# Altium PCB all.PcbDoc
Units mil, origin at the board's own origin, x right, y up, seen from the top; angles counter-clockwise.
Board outline 6000 x 4000 mil, 2 copper layers (Top Layer, Bottom Layer); 40 components, 30 nets, 132 pads, 0 vias.
Unrouted connection lines stored in the file: 78.
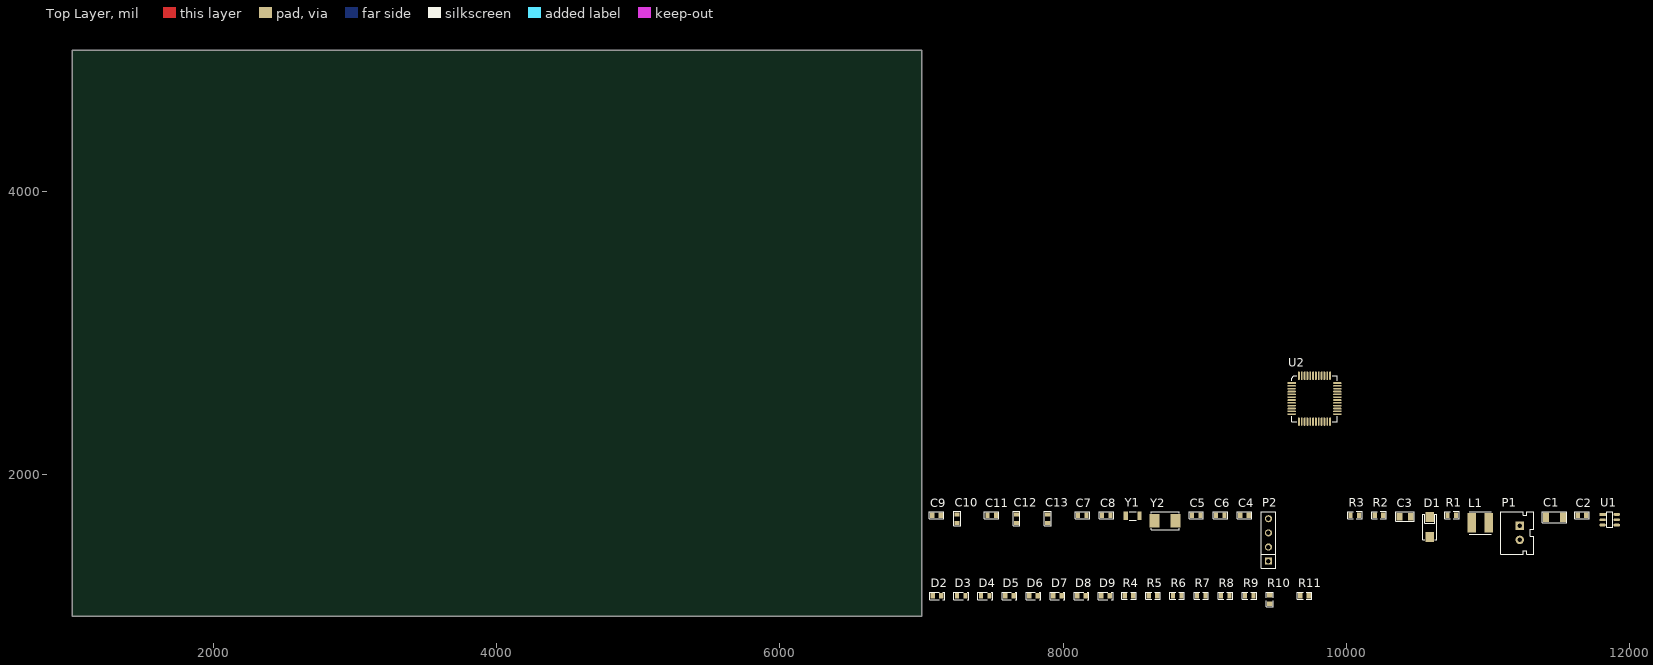
[diagram p0: Top Layer view]
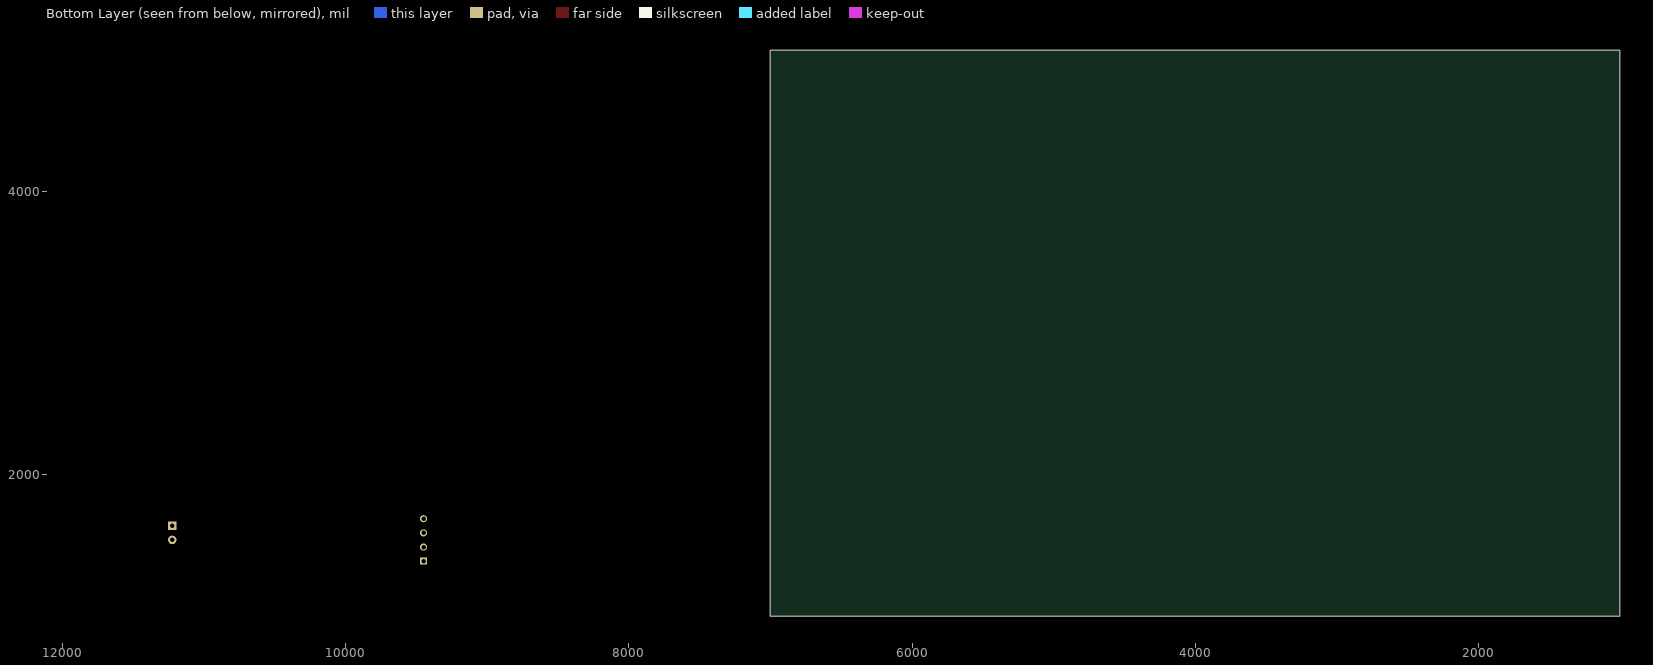
[diagram p1: Bottom Layer view, seen from below]

## Layer stack, top to bottom
Top Solder: solder mask 0.4, Solder Resist, Dk 3.5
Top Layer: signal copper 1.4
Dielectric 1: dielectric 12.6, FR-4, Dk 4.8
Bottom Layer: signal copper 1.4
Bottom Solder: solder mask 0.4, Solder Resist, Dk 3.5

## Board outline
1000,1000 7000,1000 7000,5000 1000,5000

## Design rules (kind name [scope] priority, off if disabled: settings)
Clearance [All] p1: gap=8 ignorepadtopadclearanceinfootprint=FALSE
PolygonConnect [All] p1: connectstyle=Relief reliefconductorwidth=10 reliefentries=4 polygonreliefangle="90 Angle" airgapwidth=10
RoutingVias [All] p1: holewidth=28 width=50 viastyle="Through Hole" minholewidth=28 minwidth=50 maxholewidth=28 maxwidth=50
SolderMaskExpansion [All] p1: expansion=4 istentingtop=FALSE
Width [All] p1: maxlimit=10 minlimit=10 preferedwidth=10
30 further rules are at their usual default settings.

## Components (designator, comment, footprint, x,y, rotation, side; value= is the part's Value field where it differs from the comment)
C1 "475" C1206 11410,1700 r0 top
C2 "103" C0603 11635,1715 r0 top
C3 "226" C0805 10375,1705 r0 top
C4 "104" C0603 9250,1715 r0 top
C5 "15p" C0603 8910,1715 r0 top
C6 "15p" C0603 9080,1715 r0 top
C7 "15p" C0603 8105,1715 r0 top
C8 "15p" C0603 8275,1715 r0 top
C9 "104" C0603 7075,1715 r0 top
C10 "104" C0603 7250,1660 r90 top
C11 "104" C0603 7465,1715 r0 top
C12 "104" C0603 7670,1660 r90 top
C13 "104" C0603 7890,1660 r90 top
D1 "B230A" SMA 10590,1560 r90 top
D2 "RED" LED0603-RED 7080,1145 r0 top
D3 "RED" LED0603-RED 7250,1145 r0 top
D4 "RED" LED0603-RED 7420,1145 r0 top
D5 "RED" LED0603-RED 7590,1145 r0 top
D6 "RED" LED0603-RED 7760,1145 r0 top
D7 "RED" LED0603-RED 7930,1145 r0 top
D8 "RED" LED0603-RED 8100,1145 r0 top
D9 "RED" LED0603-RED 8270,1145 r0 top
L1 "" L4X4 10885,1660 r0 top value=4μ7H
P1 "Header 2" XH2P54P2 11225,1640 r0 top
P2 "Header 4" SIP4 9450,1390 r90 top
R1 "" R0603 10715,1715 r0 top value=100K
R2 "" R0603 10200,1715 r0 top value=49K9
R3 "" R0603 10030,1715 r0 top value=16K2
R4 "" R0603 8435,1145 r0 top value=360R
R5 "" R0603 8605,1145 r0 top value=360R
R6 "" R0603 8775,1145 r0 top value=360R
R7 "" R0603 8945,1145 r0 top value=360R
R8 "" R0603 9115,1145 r0 top value=360R
R9 "" R0603 9285,1145 r0 top value=360R
R10 "" R0603 9460,1090 r90 top value=360R
R11 "" R0603 9675,1145 r0 top value=360R
U1 "MP2359" SOT23-6 11810,1720 r0 top
U2 "STM32F103C8Tx" PQFP48 9613.17,2647.8 r0 top
Y1 "32768" FC-135 8490,1710 r0 top
Y2 "8M" CY5032 8645,1675 r0 top

## Footprints (in the part's own frame and the unit in brackets; to place one, negate y for a bottom-side part, rotate by r counter-clockwise, add the part's x,y. Pads: shape width x height; smd on the part's side, far side on the other; paste and mask are expansions set on the pad)
C0603 [mil]
  rect 30x38 smd: 1(0,0) 2(60,0)
  silkscreen extent -21,-25 81,24, body extent -3,-18 63,18, height 35
C0805 [mil]
  rect 40x54 smd: 1(0,0) 2(80,0)
  silkscreen extent -26,-32 106,33, body extent -3,-29 83,29, height 53
C1206 [mil]
  rect 40x66 smd: 1(0,0) 2(120,0)
  silkscreen extent -27,-40 147,40, body extent -7,-35 127,35, height 39
CY5032 [mm]
  rect 1.8x2.4 smd: 1(0,0) 2(3.8,0)
  silkscreen extent -0.6,-1.6 4.4,1.6, body extent -0.59,-1.6 4.41,1.6, height 1.23
FC-135 [mm]
  rect 0.75x1.5 smd: 1(-1.225,0) 2(1.225,0)
  silkscreen extent -0.64,-0.75 0.64,0.75, body extent -1.6,-0.75 1.6,0.75
L4X4 [mm]
  rect 1.5x3.5 smd: 1(0,0) 2(3.048,0)
  silkscreen extent -0.48,-2 3.52,2, body extent -0.48,-2 3.52,2, height 1.02
LED0603-RED [mil]
  rect 31x38 smd: 1(0,0) 2(60,0)
  silkscreen extent -22,-26 82,26, body extent -1,-16 61,16, height 24
PQFP48 [mil]
  rect 60x12 smd: 1(-0.17,0.2)
  oval 60x12 smd: 2(-0.17,-19.8) 3(-0.17,-39.8) 4(-0.17,-59.8) 5(-0.17,-79.8) 6(-0.17,-99.8) 7(-0.17,-119.8) 8(-0.17,-139.8) 9(-0.17,-159.8) 10(-0.17,-179.8) 11(-0.17,-199.8) 12(-0.17,-219.8) 25(323.83,-219.8) 26(323.83,-199.8) 27(323.83,-179.8) 28(323.83,-159.8) 29(323.83,-139.8) 30(323.83,-119.8) 31(323.83,-99.8) 32(323.83,-79.8) 33(323.83,-59.8) 34(323.83,-39.8) 35(323.83,-19.8) 36(323.83,0.2)
  oval 12x60 smd: 13(51.83,-271.8) 14(71.83,-271.8) 15(91.83,-271.8) 16(111.83,-271.8) 17(131.83,-271.8) 18(151.83,-271.8) 19(171.83,-271.8) 20(191.83,-271.8) 21(211.83,-271.8) 22(231.83,-271.8) 23(251.83,-271.8) 24(271.83,-271.8) 37(271.83,52.2) 38(251.83,52.2) 39(231.83,52.2) 40(211.83,52.2) 41(191.83,52.2) 42(171.83,52.2) 43(151.83,52.2) 44(131.83,52.2) 45(111.83,52.2) 46(91.83,52.2) 47(71.83,52.2) 48(51.83,52.2)
  silkscreen extent 0,-272 324,52, body extent -15,-286 339,68, height 57
R0603 [mil]
  rect 30x38 smd: 1(0,0) 2(60,0)
  silkscreen extent -21,-25 81,26, body extent -4,-19 64,19, height 22
SIP4 [mil]
  rect 50x50 hole 32: 1(0,0)
  round 50 hole 32: 2(100,0) 3(200,0) 4(300,0)
  silkscreen extent -50,-50 350,50, body extent -50,-50 350,50, height 337
SMA [mm]
  rect 1.8x1.5 smd: 1(0,0) 2(3.6,0)
  silkscreen extent -0.43,-1.27 4.07,1.27, body extent -0.47,-1.35 4.13,1.35, height 2.4
SOT23-6 [mil]
  rect 45x20 smd: 1(-0.17,0.2)
  oval 45x20 smd: 2(-0.17,-37.8) 3(-0.17,-74.8) 4(99.83,-74.8) 5(99.83,-37.8) 6(99.83,0.2)
  silkscreen extent 30,-90 70,20, body extent -6,-95 104,19, height 57
XH2P54P2 [mil]
  rect 60x60 hole 32: 1(0,0)
  round 60 hole 32: 2(0,-100)
  silkscreen extent -135,-200 100,100, body extent -135,-198 89,97, height 276

## Part data
C1 C2 C3 C4 C5 C6 C7 C8 C9 C10 C11 C12 C13: library part Cap, "Capacitor", LatestRevisionDate=17-Jul-2002, LatestRevisionNote="Re-released for DXP Platform.", PackageDescription="Radial Cap, Thru-Hole; 2 Leads; 0.3 in Pin Spacing", PackageReference=RAD-0.3, Published=8-Jun-2000, Publisher="Altium Limited"
D1: library part "Diode BAS70", "Silicon AF Schottky Diode for High-Speed Switching", ComponentLink1Description="Manufacturer Link", ComponentLink1URL=http://www.infineon.com/, ComponentLink2Description=Datasheet, ComponentLink2URL=http://www.infineon.com/upload/Document/cmc_upload/documents/009/382/bas40_bas140series_1.pdf, DatasheetVersion=Oct-1999, LatestRevisionDate=29-May-2009, LatestRevisionNote="IPC-7351 Footprint Added.", Note="Pin 2 is not connected and not drawn.", PackageDescription="3-Pin SOT-23 Package 0.95 mm Pitch, 2.5 mm Lead Span", PackageReference=SOT-23, PackageVersion=Sep-2001, Published=21-Mar-2003, Publisher="Altium Limited"
D2 D3 D4 D5 D6 D7 D8 D9: library part LED0, "Typical INFRARED GaAs LED", LatestRevisionDate=08-Jul-2005, LatestRevisionNote="Mech Layer 1 removed.", PackageDescription="LED; 2 Leads", PackageReference=LED-0, Published=8-Jun-2000, Publisher="Altium Limited"
L1: library part Inductor, Code_IEC=1005, Code_JEITA=0402, LatestRevisionDate=29-May-2009, LatestRevisionNote="IPC-7351 Footprint Added.", PackageDescription="Chip Inductor", PackageReference=0402-A, Published=8-Jun-2000, Publisher="Altium Limited"
P1: library part "Header 2H", "Header, 2-Pin, Right Angle", LatestRevisionDate=17-Jul-2002, LatestRevisionNote="Re-released for DXP Platform.", Publisher="Altium Limited"
P2: "Header, 4-Pin", LatestRevisionDate=17-Jul-2002, LatestRevisionNote="Re-released for DXP Platform.", Publisher="Altium Limited"
R1 R2 R3 R4 R5 R6 R7 R8 R9 R10 R11: library part Res2, "Resistor", LatestRevisionDate=17-Jul-2002, LatestRevisionNote="Re-released for DXP Platform.", PackageDescription="Axial Device, Thru-Hole; 2 Leads; 0.4 in Pin Spacing", PackageReference=AXIAL-0.4, Published=8-Jun-2000, Publisher="Altium Limited"
Y1 Y2: library part XTAL, "Crystal Oscillator", LatestRevisionDate=17-Jul-2002, LatestRevisionNote="Re-released for DXP Platform.", PackageDescription="Crystal, Thru-Hole; 2 Leads; Body 3.1 x 8.2 mm (Dia.xH)", PackageReference=R38, Published=8-Jun-2000, Publisher="Altium Limited"

## Nets (pads, with @x,y where several pads share a name; then routed paths per layer and width w, separated by ;. In a path a pad name is that pad's centre, name@x,y a point inside that pad or via, vN(x,y) a via of type N, cw(c..) or ccw(c..) an arc to the next point about the centre after c; other vN are vias at no path point)
3V3: C3.2 L1.2 R2.1 R4.1 R5.1 R6.1 R7.1 R8.1 R9.1 R10.1 R11.1 U2.1 U2.9 U2.24 U2.36 U2.48
LED0: D2.2 U2.18
LED1: D3.2 U2.19
LED2: D4.2 U2.20
LED3: D5.2 U2.39
LED4: D6.2 U2.40
LED5: D7.2 U2.41
LED6: D8.2 U2.42
LED7: D9.2 U2.43
NetC1_1: C1.1 C3.1 C4.1 C5.2 C6.2 C7.2 C8.2 C9.1 C10.1 C11.1 C12.1 C13.1 D1.1 P1.1 P2.4 R3.2 U1.2 U2.8 U2.23 U2.35 U2.44 U2.47
NetC2_1: C2.1 L1.1 U1.6
NetC2_2: C2.2 U1.1
NetC4_2: C4.2 U2.7
NetD2_1: D2.1 R4.2
NetD3_1: D3.1 R5.2
NetD4_1: D4.1 R6.2
NetD5_1: D5.1 R7.2
NetD6_1: D6.1 R8.2
NetD7_1: D7.1 R9.2
NetD8_1: D8.1 R10.2
NetD9_1: D9.1 R11.2
NetR1_2: R1.2 U1.4
NetR2_2: R2.2 R3.1 U1.3
OSC32_IN: C5.1 U2.3 Y1.2
OSC32_OUT: C7.1 U2.4 Y1.1
OSC_IN: C6.1 U2.5 Y2.2
OSC_OUT: C8.1 U2.6 Y2.1
SWCLK: P2.2 U2.34
SWDIO: P2.3 U2.37
VCC: C1.2 C9.2 C10.2 C11.2 C12.2 C13.2 P1.2 P2.1 R1.1 U1.5
pads on no net: D1.2 U2.2 U2.10 U2.11 U2.12 U2.13 U2.14 U2.15 U2.16 U2.17 U2.21 U2.22 U2.25 U2.26 U2.27 U2.28 U2.29 U2.30 U2.31 U2.32 U2.33 U2.38 U2.45 U2.46